# EAGLE board source_eagle (EAGLE 9.6.2)
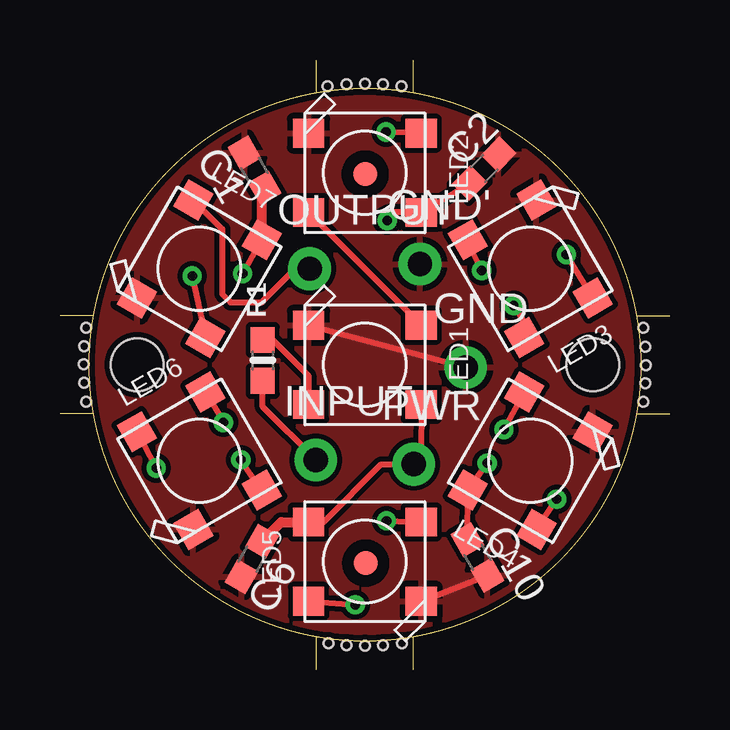
[diagram p0: board, top side]
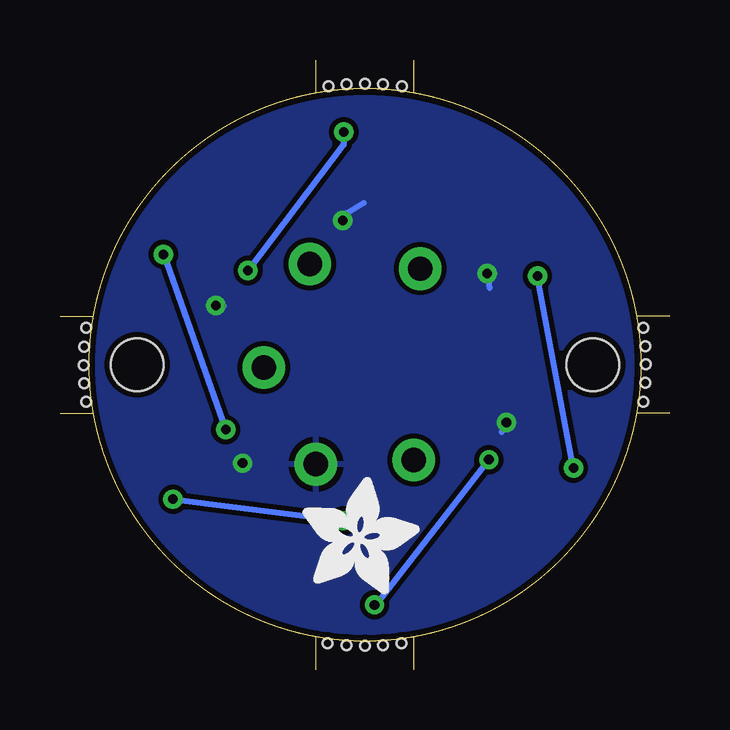
[diagram p1: board, bottom side, seen from below]

Size 25.43 x 25.4 mm. Coordinates in mm from the lower left corner, seen from the top.
Outline: 10.68,25.4 10.68,24.03
Outline: 14.74,24.03 14.74,25.4
Outline: 14.74,0 14.74,1.37
Outline: 10.68,1.37 10.68,0
Outline: 25.43,14.72 24.05,14.72
Outline: 24.05,10.65 25.43,10.65
Outline: 0,10.68 1.37,10.68
Outline: 1.37,14.74 0,14.74
Outline: circle at 12.71,12.7 radius 11.5
Copper layers (1*16): Top 0.035mm / dielectric 1.5mm / Bottom 0.035mm
Design rules "adafruit": minimum track width 8mil, minimum drill 15.5mil, track to track 8mil, track to pad 8mil, pad to pad 8mil, via to via 8mil, smd to smd 8mil, copper to edge 10mil, drill to drill 8mil, minimum pad ring 10mil, minimum via ring 8mil, stop-mask expansion 4mil, vias tented up to drill 20mil, thermal gap 10mil
Holes 2.2 mm at 22.21,12.7 3.21,12.7
Holes 0.4 mm at 12.71,24.41 11.95,24.38 13.47,24.38 14.24,24.31 11.16,24.31 12.71,0.99 13.47,1.02 11.95,1.02 11.19,1.09 14.26,1.09 24.43,12.69 24.41,13.45 24.41,11.93 24.33,11.16 24.33,14.24 0.99,12.71 1.02,11.95 1.02,13.47 1.09,14.24 1.09,11.16

## Footprints (pad centres in the part's own frame; a part is rotated, then mirrored left to right if it is on the bottom)
C0603 = smd 1.1 x 1: 1 -0.85,0; 2 0.85,0
FIDUCIAL_1MM = smd 1 x 1: 1 0,0
1X01-CLEANBIG = drill 1.016 pad 1.778: 1 0,0
WS2812B-NARROW = smd 1.3 x 1.2: 1-VDD 2.35,-1.65; 2-DOUT 2.35,1.65; 3-GND -2.35,1.65; 4-DIN -2.35,-1.65
0603-NO = smd 1.075 x 1: 1 -0.85,0; 2 0.85,0

## Placement (x,y rotation side)
C1  1uF  [C0603]  8.11,20.8 120 top
C2  1uF  [C0603]  17.69,20.87 45 top
C6  1uF  [C0603]  7.99,4.61 240 top
C10  1uF  [C0603]  17.41,4.67 300 top
FID1  FIDUCIAL_1MM  [FIDUCIAL_1MM]  12.72,20.64 0 top
FID2  FIDUCIAL_1MM  [FIDUCIAL_1MM]  12.75,4.43 0 top
GND  [1X01-CLEANBIG]  16.92,12.59 0 top
GND'  [1X01-CLEANBIG]  15.01,16.9 0 top
INPUT  [1X01-CLEANBIG]  10.67,8.74 0 top
LED1  WS2812B_5050N  [WS2812B-NARROW]  12.71,12.7 0 top
LED2  WS2812B_5050N  [WS2812B-NARROW]  12.71,20.7 0 top
LED3  WS2812B_5050N  [WS2812B-NARROW]  19.61,16.7 300 top
LED4  WS2812B_5050N  [WS2812B-NARROW]  19.61,8.7 240 top
LED5  WS2812B_5050N  [WS2812B-NARROW]  12.71,4.5 180 top
LED6  WS2812B_5050N  [WS2812B-NARROW]  5.81,8.7 120 top
LED7  WS2812B_5050N  [WS2812B-NARROW]  5.81,16.7 60 top
OUTPUT  [1X01-CLEANBIG]  10.41,16.7 0 top
PLABEL0  [PLABEL0]  8.35,9.21 0 top
PLABEL1  [PLABEL1]  11.26,17.18 0 top
PLABEL2  [PLABEL2]  17.43,13.9 105 top
PLABEL3  [PLABEL3]  13.68,7.02 90 top
PLABEL4  [PLABEL4]  9.43,5.29 0 bottom
PLABEL5  [PLABEL5]  9.19,16.87 0 bottom
PLABEL6  [PLABEL6]  21,13.65 0 bottom
PLABEL7  [PLABEL7]  21.08,4.69 0 bottom
PLABEL8  [PLABEL8]  19.79,17.63 0 bottom
PLABEL9  [PLABEL9]  15.38,10.67 0 bottom
PWR  [1X01-CLEANBIG]  14.76,8.56 0 top
R1  470  [0603-NO]  8.46,12.88 90 top
U$3  [ADAFRUIT_5MM]  15.31,3.15 0 bottom

## Library data of the parts
C1 C2 C6 C10 = rcl; ROT: 180; SPICEPREFIX: C
FID1 FID2 = microbuilder; BOM: EXCLUDE; ROT: 180
GND GND' INPUT OUTPUT PWR U$3 = NeoPixelRing; ROT: 180
LED1-LED7 R1 = microbuilder; ROT: 180
PLABEL0 PLABEL1-PLABEL9 = pinguin

## Nets
GND: C1.2 C2.2 C6.2 C10.2 GND'.1 GND.1 LED1.3-GND LED2.3-GND LED3.3-GND LED4.3-GND LED5.3-GND LED6.3-GND LED7.3-GND
N$1: LED1.2-DOUT LED2.4-DIN
N$2: LED2.2-DOUT LED3.4-DIN
N$3: LED3.2-DOUT LED4.4-DIN
N$4: LED4.2-DOUT LED5.4-DIN
N$5: LED5.2-DOUT LED6.4-DIN
N$6: LED6.2-DOUT LED7.4-DIN
N$7: LED7.2-DOUT OUTPUT.1
N$12: LED1.4-DIN R1.2
N$13: INPUT.1 R1.1
VDD: C1.1 C2.1 C6.1 C10.1 LED1.1-VDD LED2.1-VDD LED3.1-VDD LED4.1-VDD LED5.1-VDD LED6.1-VDD LED7.1-VDD PWR.1

## Tracks (layer width: path | path; a pad name or v marks a point on that pad's centre or on a via)
GND
  Top 0.254: LED5.3-GND C10.2 | LED1.3-GND GND.1
  pour Top: 0.71,0.7 24.71,0.7 24.71,24.7 0.71,24.7
N$1
  Top 0.254: LED2.4-DIN LED1.2-DOUT
N$2  (via drill 0.4)
  Top 0.254: LED2.2-DOUT 15.05,22.36 v13.59,22.4 | v17.59,16.63 17.01,17.78 LED3.4-DIN
  Bottom 0.254: v17.59,16.63 13.59,21.86 v13.59,22.4
N$3  (via drill 0.4)
  Top 0.254: LED3.2-DOUT v21.11,17.3 | v18.51,10 LED4.4-DIN
  Bottom 0.254: v21.11,17.3 v18.51,10
N$4  (via drill 0.4)
  Top 0.254: LED4.2-DOUT v20.71,7.1 | v13.61,6.2 LED5.4-DIN
  Bottom 0.254: v20.71,7.1 v13.61,6.2
N$5  (via drill 0.4)
  Top 0.254: LED5.2-DOUT v12.31,2.7 | v7.54,8.75 8.29,7.61 LED6.4-DIN
  Bottom 0.254: v12.31,2.7 11.99,3.02 v7.54,8.75
N$6  (via drill 0.4)
  Top 0.254: LED6.2-DOUT v4.01,8.4 | v5.51,16.4 LED7.4-DIN
  Bottom 0.254: v4.01,8.4 v5.51,16.4
N$7
  Top 0.254: LED7.2-DOUT 6.77,18.35 6.77,15.65 7.11,15.3 8.41,15.3 10.02,16.9 OUTPUT.1
N$12
  Top 0.254: R1.2 8.88,13.73 10.36,12.25 LED1.4-DIN
N$13
  Top 0.254: INPUT.1 8.46,10.95 R1.1
VDD  (via drill 0.4)
  Top 0.254: C10.1 LED4.1-VDD v17.81,8.6 | C2.1 LED2.1-VDD 13.65,19.05 v13.64,18.72 | LED7.1-VDD v7.61,16.5 | LED3.1-VDD 19.36,14.5 v18.92,15.17 | LED5.1-VDD 11,6.15 13.4,8.55 PWR.1 15.06,8.94 LED1.1-VDD | LED6.1-VDD v6.81,10.3
  Top 0.406: C6.1 9.23,6.15 LED5.1-VDD | C1.1 8.42,19.94 LED7.1-VDD
  Bottom 0.254: v7.61,16.5 7.51,15.9 | v13.64,18.72 13.48,19.02 12.77,19.45 | v18.92,15.17 18.62,15.17 18.59,15.15 | v17.81,8.6 18.01,8.8 | v6.81,10.3 7.01,9.9
  pour Bottom: 0.71,24.7 0.71,0.7 24.71,0.7 24.71,24.7

## Text on the board
Pinguin_tBackup: OUT | GND | PWR | IN
Pinguin_bBackup: Data / Out | GND | GND | NeoPixel / Jewel 7 | 5V DC / Power | Data / Input